# Altium PCB AlcoholDetectie.PcbDoc
Units mil, origin at the board's own origin, x right, y up, seen from the top; angles counter-clockwise.
Board outline 5015 x 2055 mil, 2 copper layers (Top Layer, Bottom Layer); 28 components, 33 nets, 105 pads, 1 vias.
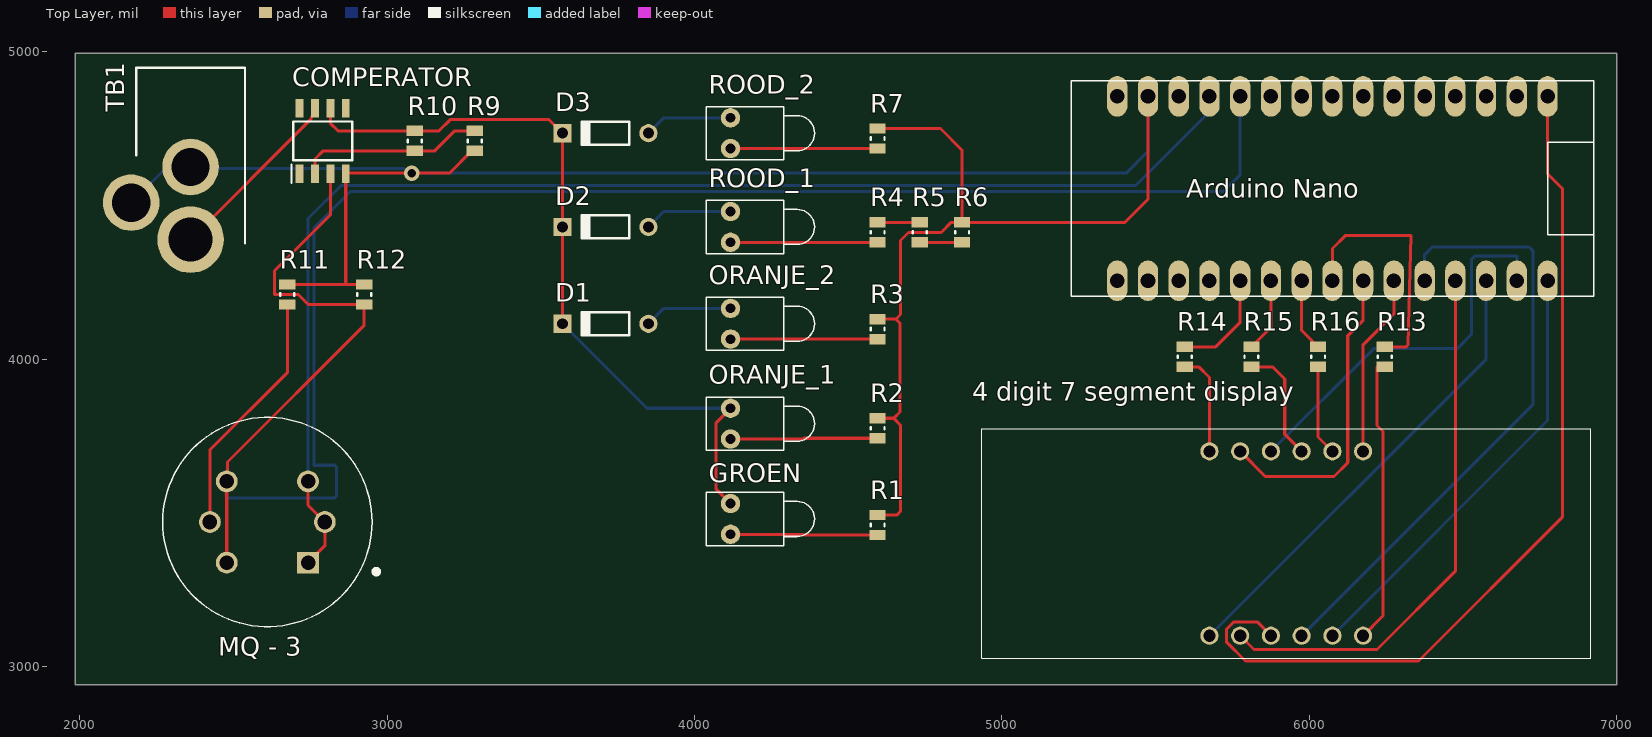
[diagram p0: Top Layer view]
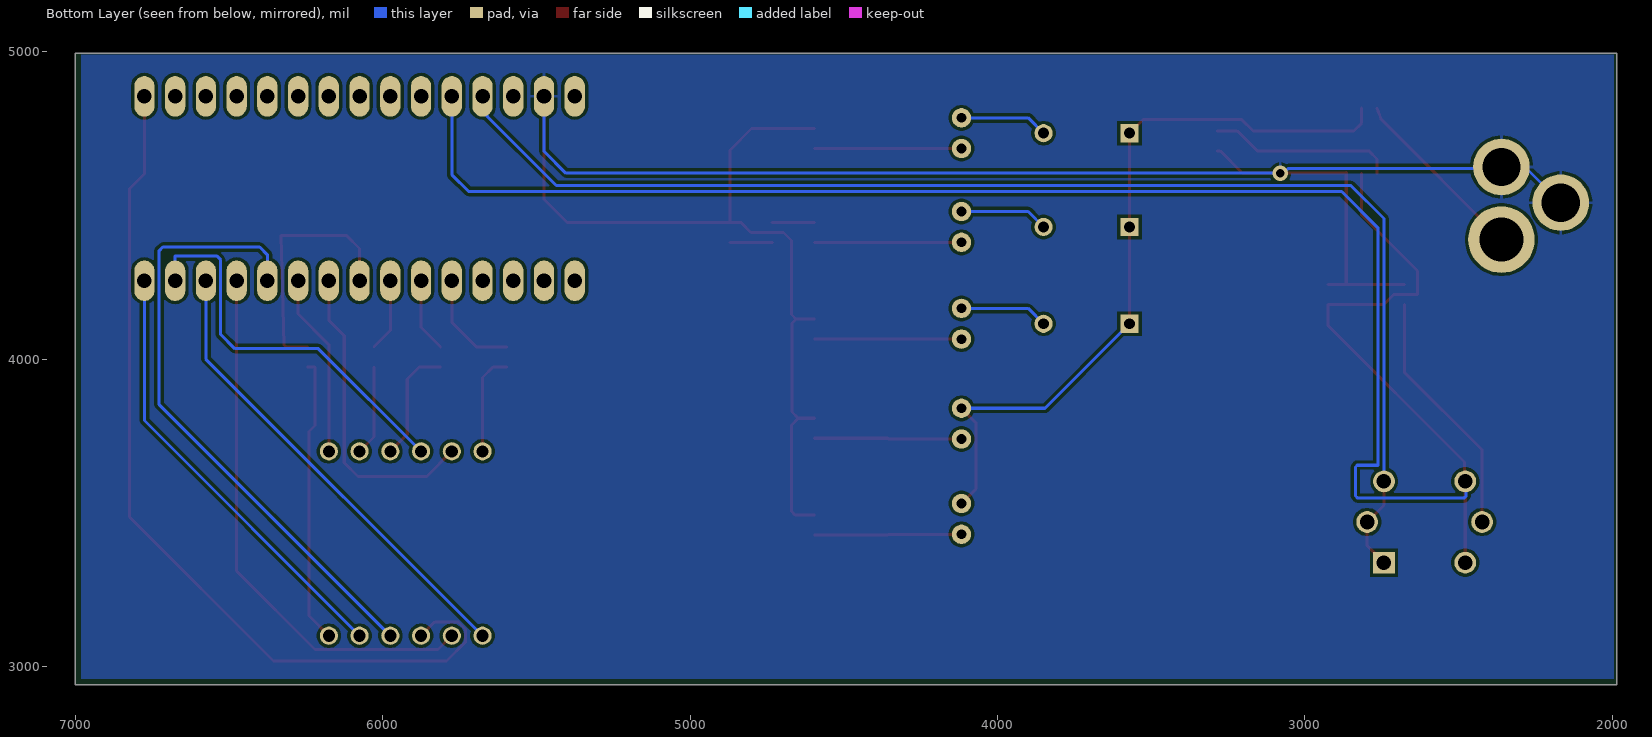
[diagram p1: Bottom Layer view, seen from below]

## Layer stack, top to bottom
Top Solder: solder mask 0.4, Solder Resist, Dk 3.5
Top Layer: signal copper 1.4
Dielectric 1: dielectric 12.6, FR-4, Dk 4.8
Bottom Layer: signal copper 1.4
Bottom Solder: solder mask 0.4, Solder Resist, Dk 3.5

## Board outline
1985,2940 7000,2940 7000,4995 1985,4995

## Design rules (kind name [scope] priority, off if disabled: settings)
Clearance [All] p1: gap=10 ignorepadtopadclearanceinfootprint=FALSE except(0: Arc-Hole Track-Hole SMDPad-Hole THPad-Hole Via-Hole Fill-Hole Poly-Hole Region-Hole Text-Hole)
PolygonConnect [All] p1: connectstyle=Relief reliefconductorwidth=10 reliefentries=4 polygonreliefangle="90 Angle" airgapwidth=10
RoutingVias [All] p1: holewidth=28 width=50 viastyle="Through Hole" minholewidth=28 minwidth=50 maxholewidth=28 maxwidth=50
SolderMaskExpansion [All] p1: expansion=4 istentingtop=FALSE
Width [All] p1: maxlimit=10 minlimit=10 preferedwidth=10
30 further rules are at their usual default settings.

## Components (designator, comment, footprint, x,y, rotation, side; value= is the part's Value field where it differs from the comment)
"4 digit 7 segment display" "CC56-12SRWA" CC5612SRWA 5675,3100 r0 top
"Arduino Nano" "ARDUINONANO" PDIP-32 6925,4555 r270 top
COMPERATOR "LM7171AIM" SOIC127P600X175-8N 2790,4710 r90 top
D1 "1N4371A" DO-35 3710,4115 r180 top
D2 "1N4371A" DO-35 3710,4430 r180 top
D3 "1N4371A" DO-35 3710,4735 r180 top
GROEN "LED1" LED-1 4116.81,3480 r0 top
"MQ - 3" "SEN-08880" XDCR_SEN-08880 2610,3470 r180 top
ORANJE_1 "LED2" LED-1 4116.81,3790 r0 top
ORANJE_2 "LED3" LED-1 4116.81,4115 r0 top
R1 "80Ω" RESC2013X50X30LL20T20 4595,3460 r90 top
R2 "300Ω" RESC2013X50X30LL20T20 4595,3775 r90 top
R3 "200Ω" RESC2013X50X30LL20T20 4595,4097.52 r90 top
R4 "300Ω" RESC2013X50X30LL20T20 4595,4412.52 r90 top
R5 "300Ω" RESC2013X50X30LL20T20 4732.5,4412.52 r270 top
R6 "100Ω" RESC2013X50X30LL20T20 4870,4412.52 r90 top
R7 "820Ω" RESC2013X50X30LL20T20 4595,4717.52 r90 top
R9 "1k Ω" RESC2013X50X30LL20T20 3285,4710 r90 top
R10 "1k Ω" RESC2013X50X30LL20T20 3090,4710 r90 top
R11 "5,1 Ω" RESC2013X50X30LL20T20 2675,4210 r270 top
R12 "1k Ω" RESC2013X50X30LL20T20 2925,4210 r270 top
R13 "330 Ω" RESC2013X50X30LL20T20 6245,4007.48 r90 top
R14 "330 Ω" RESC2013X50X30LL20T20 5595,4007.48 r270 top
R15 "330 Ω" RESC2013X50X30LL20T20 5811.67,4007.48 r270 top
R16 "330 Ω" RESC2013X50X30LL20T20 6028.33,4007.48 r270 top
ROOD_1 "LED4" LED-1 4116.81,4430 r0 top
ROOD_2 "LED5" LED-1 4116.81,4735 r0 top
TB1 "Component_1" MJ-180PH 2360,4376.97 r90 top

## Footprints (in the part's own frame and the unit in brackets; to place one, negate y for a bottom-side part, rotate by r counter-clockwise, add the part's x,y. Pads: shape width x height; smd on the part's side, far side on the other; paste and mask are expansions set on the pad)
CC5612SRWA [mm]
  round 1.5 hole 1: 1(0,0) 2(2.54,0) 3(5.08,0) 4(7.62,0) 5(10.16,0) 6(12.7,0) 7(12.7,15.24) 8(10.16,15.24) 9(7.62,15.24) 10(5.08,15.24) 11(2.54,15.24) 12(0,15.24)
  silkscreen extent -18.8,-1.88 31.5,17.12, body extent -18.8,-1.88 31.5,17.12, height 8.45
DO-35 [mm] "Diode, Axial; Body 3.8 x 1.9 mm (LxDia. max), Lead Dia. 0.53 mm (max)"
  round 1.5 hole 0.9: 1(-3.55,0)
  rect 1.5x1.5 hole 0.9: 2(3.55,0)
  silkscreen extent -1.95,-0.95 2.05,0.95
LED-1 [mm] "LED; 2 Leads"
  round 1.6 hole 0.8: 1(0,1.27) 2(0,-1.27)
  silkscreen extent -2,-2.2 6.95,2.2
MJ-180PH [mm]
  round 5.5 hole 3.65: 1(0.3,0)
  round 4.67 hole 3.16: 2(6.3,0) 3(3.35,4.9)
  silkscreen extent 0,-4.5 14.5,4.5
PDIP-32 [mil]
  oval 132x66 hole 47.24: 3V3(-300,-250) +5V(-300,-1250) A0(-300,-1150) A1(-300,-1050) A2(-300,-950) A3(-300,-850) A4(-300,-750) A5(-300,-650) A6(-300,-550) A7(-300,-450) AREF(-300,-350) D0/RX(300,-1450) D1/TX(300,-1550) D2(300,-1150) D3(300,-1050) D4(300,-950) D5(300,-850) D6(300,-750) D7(300,-650) D8(300,-550) D9(300,-450) D10(300,-350) D11(300,-250) D12(300,-150) D13(-300,-150) GND(300,-1250) GND1(-300,-1450) RESET(300,-1350) RESET1(-300,-1350) VIN(-300,-1550)
  silkscreen extent -350,-1700 350,0
RESC2013X50X30LL20T20 [mm] "Chip Resistor, 2-Leads, Body 2.00x1.25mm, IPC High Density"
  rect 0.85x1.35 smd: 1(-0.825,0) 2(0.825,0)
  silkscreen extent -0.1,-0.58 0.1,0.58, body extent -1.1,-0.72 1.1,0.72, height 0.5
SOIC127P600X175-8N [mm]
  rect 1.525x0.65 smd: 1(-2.712,1.905) 2(-2.712,0.635) 3(-2.712,-0.635) 4(-2.712,-1.905) 5(2.712,-1.905) 6(2.712,-0.635) 7(2.712,0.635) 8(2.712,1.905)
  silkscreen extent -3.47,-2.45 1.6,2.58, body extent -3,-2.45 3,2.45, height 1.75
XDCR_SEN-08880 [mm]
  rect 1.8x1.8 hole 1.2: 1(-3.359,3.359)
  round 1.8 hole 1.2: 2(-4.75,0) 3(-3.359,-3.359) 4(3.359,-3.359) 5(4.75,0) 6(3.359,3.359)
  silkscreen extent -9.2,-8.65 8.65,8.65

## Part data
"4 digit 7 segment display": "Display", Manufacturer_Name=Kingbright, Mouser2 Part Number=604-CC56-12SRWA, Datasheet Link=https://componentsearchengine.com//CC56-12SRWA.pdf, Height=8.35mm, Manufacturer_Part_Number=CC56-12SRWA, Mouser2 Price/Stock=https://www.mouser.com/Search/Refine.aspx?Keyword=604-CC56-12SRWA
"Arduino Nano": "Arduino; 20MHz; 3.3Ã·5VDC; Flash: 32kB; SRAM: 2kB; ATMEGA328,FT232R", Package=None, Availability="Not in stock", Check_prices=https://www.snapeda.com/parts/ARDUINONANO/Arduino/view-part/7459719/?ref=eda, MF=Arduino, MP=ARDUINONANO, Price=None, SnapEDA_Link=https://www.snapeda.com/parts/ARDUINONANO/Arduino/view-part/7459719/?ref=snap
COMPERATOR: library part LM7171AIMX_NOPB, "Integrated Circuit", Manufacturer_Name="Texas Instruments", Manufacturer_Part_Number=LM7171AIMX/NOPB, Mouser2 Part Number=926-LM7171AIMX/NOPB, Datasheet Link=http://www.ti.com/lit/gpn/LM7171, Height=1.75mm, Mouser2 Price/Stock=https://www.mouser.com/Search/Refine.aspx?Keyword=926-LM7171AIMX%2FNOPB
D1 D2 D3: library part "Diode 1N4148", "High Conductance Fast Diode", Code_JEDEC=DO-204-AH, ComponentLink1Description="Manufacturer Link", ComponentLink1URL=http://www.fairchildsemi.com/, ComponentLink2Description=Datasheet, ComponentLink2URL=http://www.fairchildsemi.com/ds/1N%2F1N4148.pdf, DatasheetVersion=1997, LatestRevisionDate=17-Jul-2002, LatestRevisionNote="Re-released for DXP Platform.", PackageDescription="Diode, Axial; Body 3.8 x 1.9 mm (LxDia. max), Lead Dia. 0.53 mm (max)", PackageReference=DO-35, Published=8-Jun-2000, Publisher="Altium Limited"
GROEN: "Typical RED GaAs LED", LatestRevisionDate=08-Jul-2005, LatestRevisionNote="Mech Layer 1 removed.", PackageDescription="LED; 2 Leads", PackageReference=LED-1, Published=8-Jun-2000, Publisher="Altium Limited"
"MQ - 3": "Alcohol _C2H6O_ Sensor 0 V ~ 3.3 V", Package=None, Availability=Unavailable, MF="SparkFun Electronics", MP=SEN-08880, Price=None, SnapEDA_Link=https://www.snapeda.com/parts/SEN-08880/SparkFun%20Electronics/view-part/1160647/?ref=snap
ORANJE_1 ORANJE_2 ROOD_1 ROOD_2: library part LED1, "Typical RED GaAs LED", LatestRevisionDate=08-Jul-2005, LatestRevisionNote="Mech Layer 1 removed.", PackageDescription="LED; 2 Leads", PackageReference=LED-1, Published=8-Jun-2000, Publisher="Altium Limited"
R1 R2 R3 R4 R5 R6 R7 R9 R10 R11 R12 R13 R14 R15 R16: library part CMP-2001-04896-1, Manufacturer="Vishay Dale", Part Number=CRCW08050000Z0EA

## Via types
v1: diameter 50, hole 28, Top Layer to Bottom Layer, 1 vias

## Nets (pads, with @x,y where several pads share a name; then routed paths per layer and width w, separated by ;. In a path a pad name is that pad's centre, name@x,y a point inside that pad or via, vN(x,y) a via of type N, cw(c..) or ccw(c..) an arc to the next point about the centre after c; other vN are vias at no path point)
+5: "Arduino Nano.+5V" "MQ - 3.1" "MQ - 3.2" "MQ - 3.3" | length 4291.7
  Top Layer w10: 2742.23,3337.77 2797.01,3392.54 2797.01,3470 2742.23,3524.77 2742.23,3602.23
  Bottom Layer w10: 2742.23,3602.23 2742.23,4457.23 2850,4565 5435,4565 5659.56,4789.56 5659.56,4791.41 5675,4806.85 5675,4855
+15: COMPERATOR.7 TB1.1 | length 592.5
  Top Layer w10: TB1.1 2751.22,4780 COMPERATOR.7
D2: "Arduino Nano.D2" R14.1 | length 348.2
  Top Layer w10: R14.1 5694.96,4039.96 5775,4120 5775,4255
D3: "Arduino Nano.D3" R15.1 | length 241.3
  Top Layer w10: R15.1 5875,4103.29 5875,4255
D4: "Arduino Nano.D4" R16.1 | length 237.1
  Top Layer w10: 5975,4255 5975,4093.29 R16.1
D5: "Arduino Nano.D5" R13.2 | length 849.8
  Top Layer w10: 6075,4255 6075,4360 6116.72,4401.72 6330,4401.72 6327.02,4289.27 6320.86,4045.82 6315,4039.96 R13.2
  Bottom Layer w10: 6075,4255 6075,4286.21 6077.93,4289.14 6078.94,4290.16 6080.16,4290.82 cw(c6085,4282.07) 6080.23,4290.86
D6: "4 digit 7 segment display.11" "Arduino Nano.D6" | length 1015.3
  Top Layer w10: 5775,3700 5857,3618 6080,3618 6125,3663 6125,4076 6175,4126 6175,4255
D7: "4 digit 7 segment display.7" "Arduino Nano.D7" | length 596.4
  Top Layer w10: 6175,3700 6175,4047 6275,4147 6275,4255
D8: "4 digit 7 segment display.4" "Arduino Nano.D8" | length 2016.8
  Bottom Layer w10: 5975,3100 6727,3852 6727,4353 6715,4365 6400,4365 6375,4340 6375,4255
D9: "4 digit 7 segment display.2" "Arduino Nano.D9" | length 1769.3
  Top Layer w10: 5775,3100 5820,3055 6220,3055 6475,3310 6475,4255
D10: "4 digit 7 segment display.1" "Arduino Nano.D10" | length 1527.8
  Bottom Layer w10: 5675,3100 6575,4000 6575,4255
D11: "4 digit 7 segment display.10" "Arduino Nano.D11" | length 1286.8
  Bottom Layer w10: 5875,3700 6209,4034 6481,4034 6527,4080 6527,4323 6540,4336 6675,4336 6675,4255
D12: "4 digit 7 segment display.5" "Arduino Nano.D12" | length 1444.9
  Bottom Layer w10: 6075,3100 6775,3800 6775,4255
D13: "4 digit 7 segment display.3" "Arduino Nano.D13" | length 2915.4
  Top Layer w10: 5875,3100 5830,3145 5755,3145 5730,3120 5730,3080 5792,3018 6355,3018 6823,3486 6823,4555 6775,4603 6775,4855
GND: "Arduino Nano.GND1" COMPERATOR.4 R1.2 R2.2 R3.2 R6.2 R7.2 R9.1 R11.1 R12.1 TB1.2 TB1.3 | length 7473.1
  Top Layer w10: R11.1 2867.52,4242.48 ; COMPERATOR.4 2865,4586 2865,4245 2867.52,4242.48 ; COMPERATOR.4@2865,4607.2 2867.2,4605 3202.64,4605 3275.16,4677.52 R9.1 ; R12.1 2867.52,4242.48 ; R1.2 4657.48,3492.48 4670,3505 4670,3785 4647.52,3807.48 ; R2.2 4647.52,3807.48 ; R3.2 4655,4130 ; R7.2 4800,4750 4870,4680 R6.2 ; 5475,4855 5475,4520 5400,4445 R6.2 ; 4647.52,3807.48 4668.04,3828 4668.04,4116.96 4655,4130 ; 4655,4130 4670,4145 4670,4386 4696,4412 4802,4412 4835,4445 R6.2
  Bottom Layer w10: TB1.3 2283.23,4625 TB1.2 2365,4620 3054.18,4620 3069.18,4605 5404,4605 5475,4676 5475,4855
  other v1: 3080,4605
"Net4 digit 7 segment display_6": "4 digit 7 segment display.6" R13.1 | length 934.8
  Top Layer w10: 6175,3100 6239.53,3164.53 6239.53,3764.53 6220,3784.06 6220,3975 R13.1
"Net4 digit 7 segment display_8": "4 digit 7 segment display.8" R16.2 | length 294.3
  Top Layer w10: R16.2 6028.33,3746.67 6075,3700
"Net4 digit 7 segment display_9": "4 digit 7 segment display.9" R15.2 | length 382.7
  Top Layer w10: R15.2 5880,3975 5920,3935 5920,3755 5975,3700
"Net4 digit 7 segment display_12": "4 digit 7 segment display.12" R14.2 | length 334.5
  Top Layer w10: R14.2 5640,3975 5675,3940 5675,3700
"NetArduino Nano_A0": "Arduino Nano.A0" "MQ - 3.4" "MQ - 3.6" COMPERATOR.3 R12.2 | length 6494.3
  Top Layer w10: 2477.77,3337.77 2477.77,3602.23 2480,3604.47 2480,3665 2925,4110 R12.2 2743,4177.52 2710.52,4210 2633,4210 2633,4287 2815,4469 COMPERATOR.3
  Bottom Layer w10: 2477.77,3602.23 2475,3599.47 2475,3554.47 2480.86,3548.61 2829.14,3548.61 2835,3554.47 2835,3648.84 2829.14,3654.7 2762.23,3654.7 2762.23,4427.23 2880,4545 5720,4545 5775,4600 5775,4855
NetCOMPERATOR_2: COMPERATOR.2 R9.2 R10.1 | length 605.7
  Top Layer w10: COMPERATOR.2 2765,4651 2791.52,4677.52 R10.1 3155,4677.52 3219.96,4742.48 R9.2
NetCOMPERATOR_6: COMPERATOR.6 D1.2 D2.2 D3.2 GROEN.1 ORANJE_1.1 R10.2 | length 2477.5
  Top Layer w10: COMPERATOR.6 2815,4767.48 2840,4742.48 R10.2 3168.48,4742.48 3205,4779 3526.24,4779 D3.2 D2.2 D1.2 ; GROEN.1 4070,3576.81 4070,3793.19 ORANJE_1.1
  Bottom Layer w10: D1.2 3845.24,3840 ORANJE_1.1
NetD1_1: D1.1 ORANJE_2.1 | length 287.8
  Bottom Layer w10: D1.1 3899.76,4165 ORANJE_2.1
NetD2_1: D2.1 ROOD_1.1 | length 287.8
  Bottom Layer w10: D2.1 3899.76,4480 ROOD_1.1
NetD3_1: D3.1 ROOD_2.1 | length 287.8
  Bottom Layer w10: D3.1 3899.76,4785 ROOD_2.1
NetGROEN_2: GROEN.2 R1.1 | length 479.2
  Top Layer w10: GROEN.2 4354,3430 4356.48,3427.52 R1.1
"NetMQ - 3_5": "MQ - 3.5" R11.2 | length 811.9
  Top Layer w10: 2422.99,3470 2422.99,3704 2675,3956.01 R11.2
NetORANJE_1_2: ORANJE_1.2 R2.1 | length 479.2
  Top Layer w10: ORANJE_1.2 4354,3740 4356.52,3742.52 R2.1
NetORANJE_2_2: ORANJE_2.2 R3.1 | length 478.2
  Top Layer w10: ORANJE_2.2 4355,4065 4355.04,4065.04 R3.1
NetR4_1: R4.1 ROOD_1.2 | length 478.2
  Top Layer w10: ROOD_1.2 4355,4380 4355.04,4380.04 R4.1
NetR4_2: R4.2 R5.1 | length 137.5
  Top Layer w10: R4.2 R5.1
NetR5_2: R5.2 R6.1 | length 137.5
  Top Layer w10: R5.2 R6.1
NetR7_1: R7.1 ROOD_2.2 | length 478.2
  Top Layer w10: ROOD_2.2 4355,4685 4355.04,4685.04 R7.1
pads on no net: "Arduino Nano.3V3" "Arduino Nano.A1" "Arduino Nano.A2" "Arduino Nano.A3" "Arduino Nano.A4" "Arduino Nano.A5" "Arduino Nano.A6" "Arduino Nano.A7" "Arduino Nano.AREF" "Arduino Nano.D0/RX" "Arduino Nano.D1/TX" "Arduino Nano.GND" "Arduino Nano.RESET1" "Arduino Nano.RESET" "Arduino Nano.VIN" COMPERATOR.1 COMPERATOR.5 COMPERATOR.8

## Polygon pours and split planes (outlines as drawn)
GND on Bottom Layer "GND_L02_P000" (solid, pour order 0): 1995,4990 6980,4990 6980,2960 1995,2960